# Altium PCB Side PCB.PcbDoc
Units mil, origin at the board's own origin, x right, y up, seen from the top; angles counter-clockwise.
Board outline 6000 x 4000 mil, 2 copper layers (Top Layer, Bottom Layer); 3 components, 4 nets, 18 pads, 0 vias.
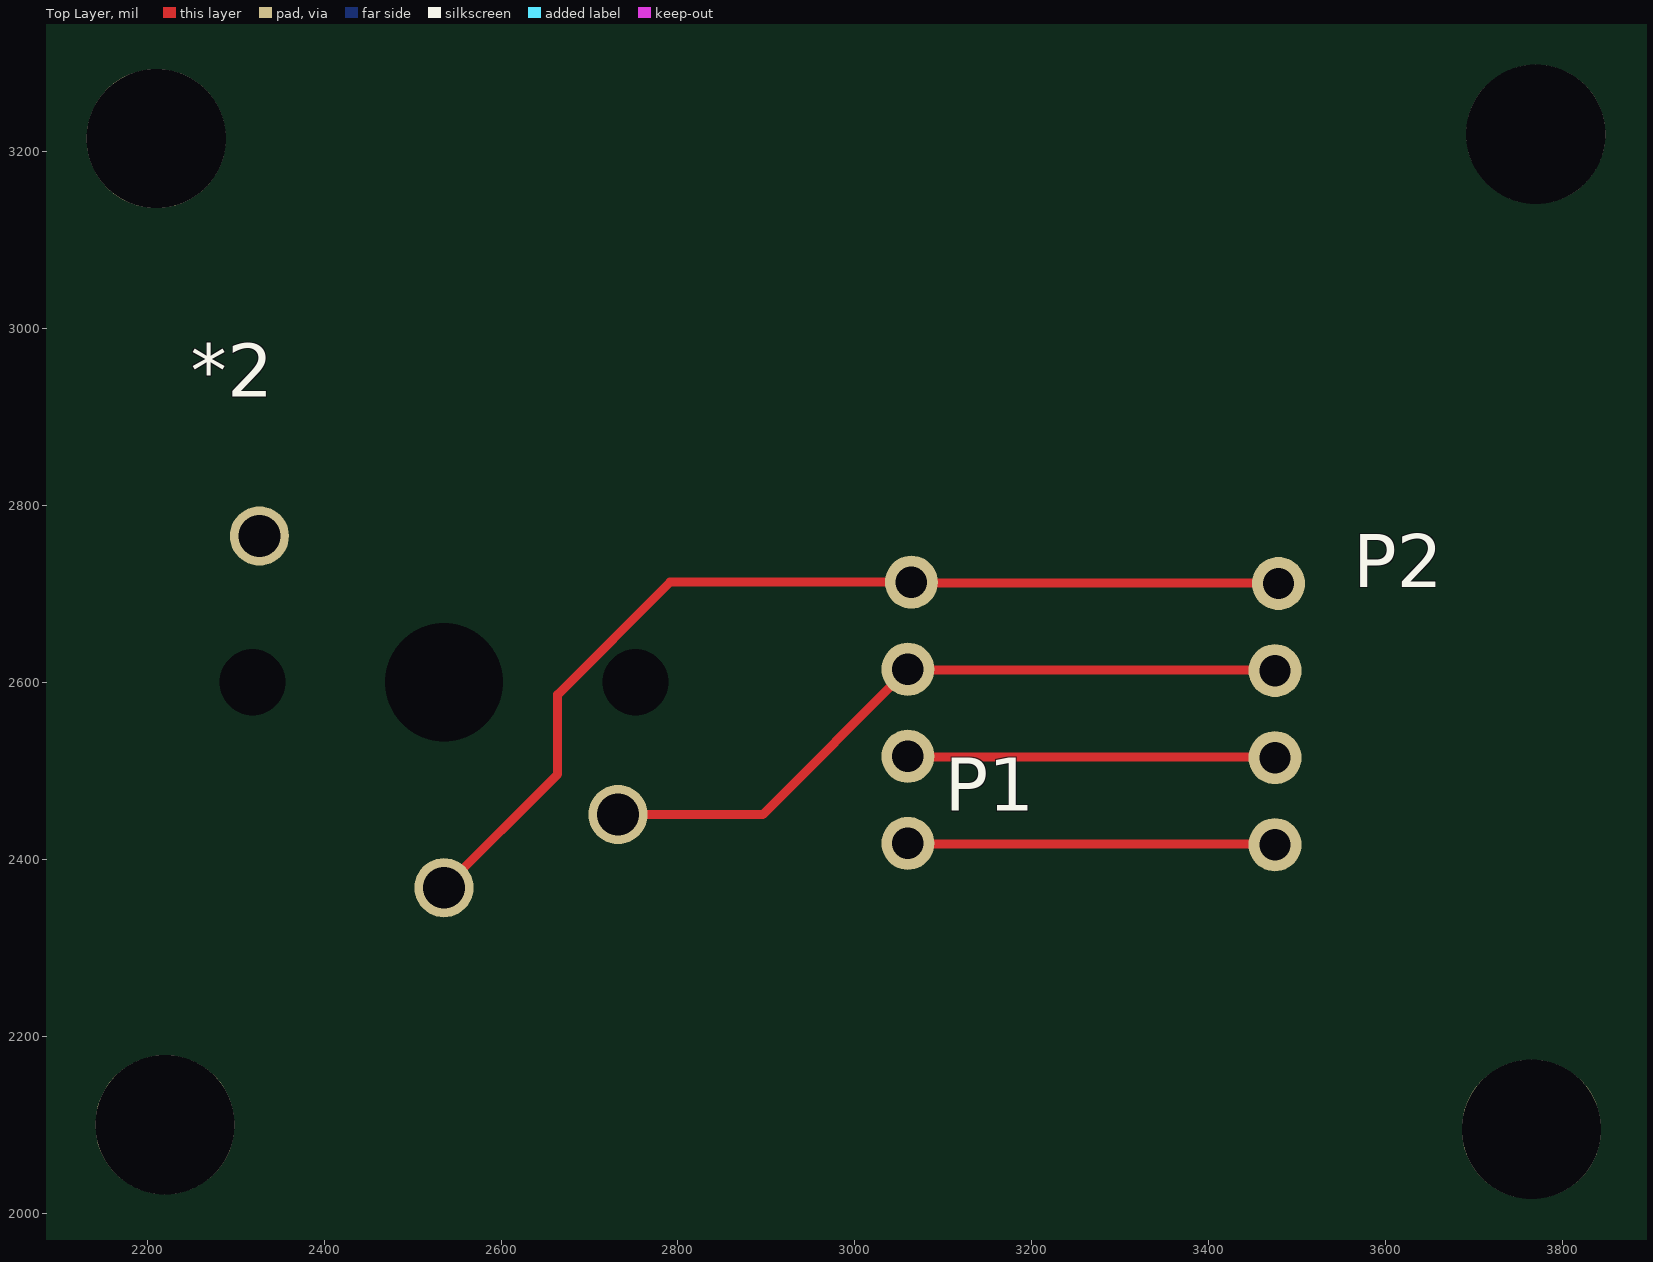
[diagram p0: Top Layer view]
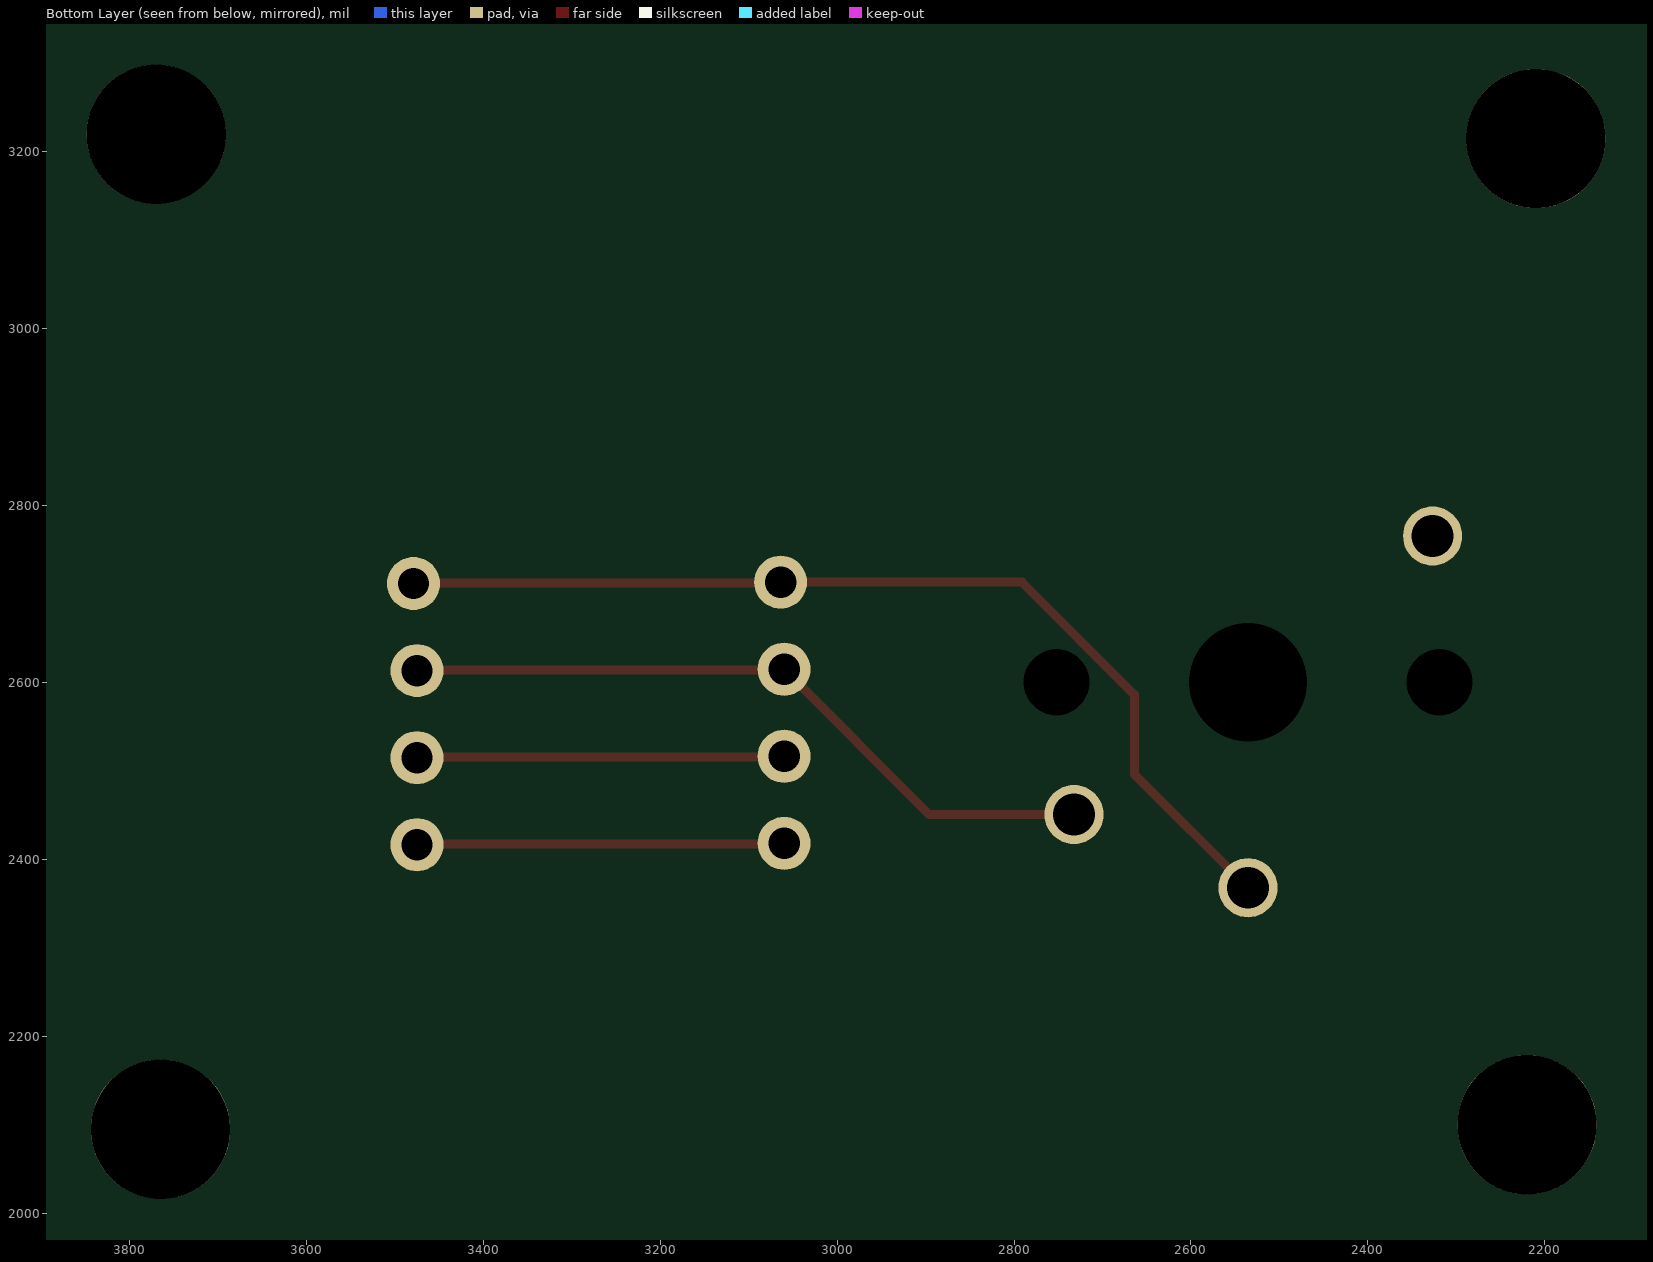
[diagram p1: Bottom Layer view, seen from below]

## Layer stack, top to bottom
Top Solder: solder mask 0.4, Solder Resist, Dk 3.5
Top Layer: signal copper 1.4
Dielectric 1: dielectric 12.6, FR-4, Dk 4.8
Bottom Layer: signal copper 1.4
Bottom Solder: solder mask 0.4, Solder Resist, Dk 3.5

## Board outline
1000,1000 7000,1000 7000,5000 1000,5000

## Design rules (kind name [scope] priority, off if disabled: settings)
Clearance [All] p1: gap=10 ignorepadtopadclearanceinfootprint=FALSE except(0: Arc-Hole Track-Hole SMDPad-Hole THPad-Hole Via-Hole Fill-Hole Poly-Hole Region-Hole Text-Hole)
PolygonConnect [All] p1: connectstyle=Relief reliefconductorwidth=10 reliefentries=4 polygonreliefangle="90 Angle" airgapwidth=10
RoomDefinition "Side PCB" [InComponentClass('Side PCB')] p1: confinementstyle=ConfineIn formatcopy=TRUE lockcomponents=FALSE outline 2105,1980 4690,1980 4690,3310 2105,3310
RoutingVias [All] p1: holewidth=28 width=50 viastyle="Through Hole" minholewidth=28 minwidth=50 maxholewidth=28 maxwidth=50
SolderMaskExpansion [All] p1: expansion=4
Width [All] p1: maxlimit=10 minlimit=10 preferedwidth=10
30 further rules are at their usual default settings.

## Components (designator, comment, footprint, x,y, rotation, side; value= is the part's Value field where it differs from the comment)
*2 "KAILH_LOW_PROFILE" KAILH_LOW_PROFILE 2530,2605 r90 top
P1 "JST_SE_4PIN" JST_SE_4PIN 3193.86,2323.66 r90 top
P2 "JST_SE_4PIN" JST_SE_4PIN 3608.86,2322.09 r90 top

## Footprints (in the part's own frame and the unit in brackets; to place one, negate y for a bottom-side part, rotate by r counter-clockwise, add the part's x,y. Pads: shape width x height; smd on the part's side, far side on the other; paste and mask are expansions set on the pad)
JST_SE_4PIN [mm]
  round 1.524 hole 0.9: 1(9.9,3.3) 2(7.4,3.4) 3(4.9,3.4) 4(2.4,3.4)
  body extent -0.01,0.05 12.27,5.72, height 7
KAILH_LOW_PROFILE [mm]
  round 1.7 hole 1.2: 0(-6.02,-0.138) 1(-3.92,-5.138) ""(4.08,5.162)
  round 1.524 hole 1.9: ""(-0.12,5.362) ""(-0.12,-5.638)
  round 1.524 hole 3.4: ""(-0.12,-0.138)
  body extent -7.82,-7.74 7.18,7.26, height 8

## Free pads (board coordinates)
  round 157.48 hole 157.48: 3(2210,3215) 3(2220,2100) 3(3765,2095) 3(3770,3220)

## Nets (pads, with @x,y where several pads share a name; then routed paths per layer and width w, separated by ;. In a path a pad name is that pad's centre, name@x,y a point inside that pad or via, vN(x,y) a via of type N, cw(c..) or ccw(c..) an arc to the next point about the centre after c; other vN are vias at no path point)
+3.3: *2.1 P1.2 P2.2 | length 811.4
  Top Layer w10: *2.1 2895.67,2450.67 P1.2 3060.79,2614.21 3474.21,2614.21 P2.2
GND: P1.4 P2.4 | length 415.7
  Top Layer w10: P1.4 3060.79,2417.36 3474.21,2417.36 P2.4
Net*2_0: *2.0 P1.1 P2.1 | length 1139.9
  Top Layer w10: *2.0 2663.89,2496.44 2663.89,2586.3 2791.01,2713.43 P1.1 3064.72,2712.64 3478.15,2712.64 P2.1
NetP1_3: P1.3 P2.3 | length 415.7
  Top Layer w10: P1.3 3060.79,2515.79 3474.21,2515.79 P2.3
pads on no net: *2.